# Altium PCB nrf52832_qfax_nfc.PcbDoc
Units mm, origin at the board's own origin, x right, y up, seen from the top; angles counter-clockwise.
Board outline 70.73 x 30.48 mm, 2 copper layers (Top Layer, Bottom Layer), stack 1.671 mm thick; 64 components, 75 nets, 276 pads, 97 vias.
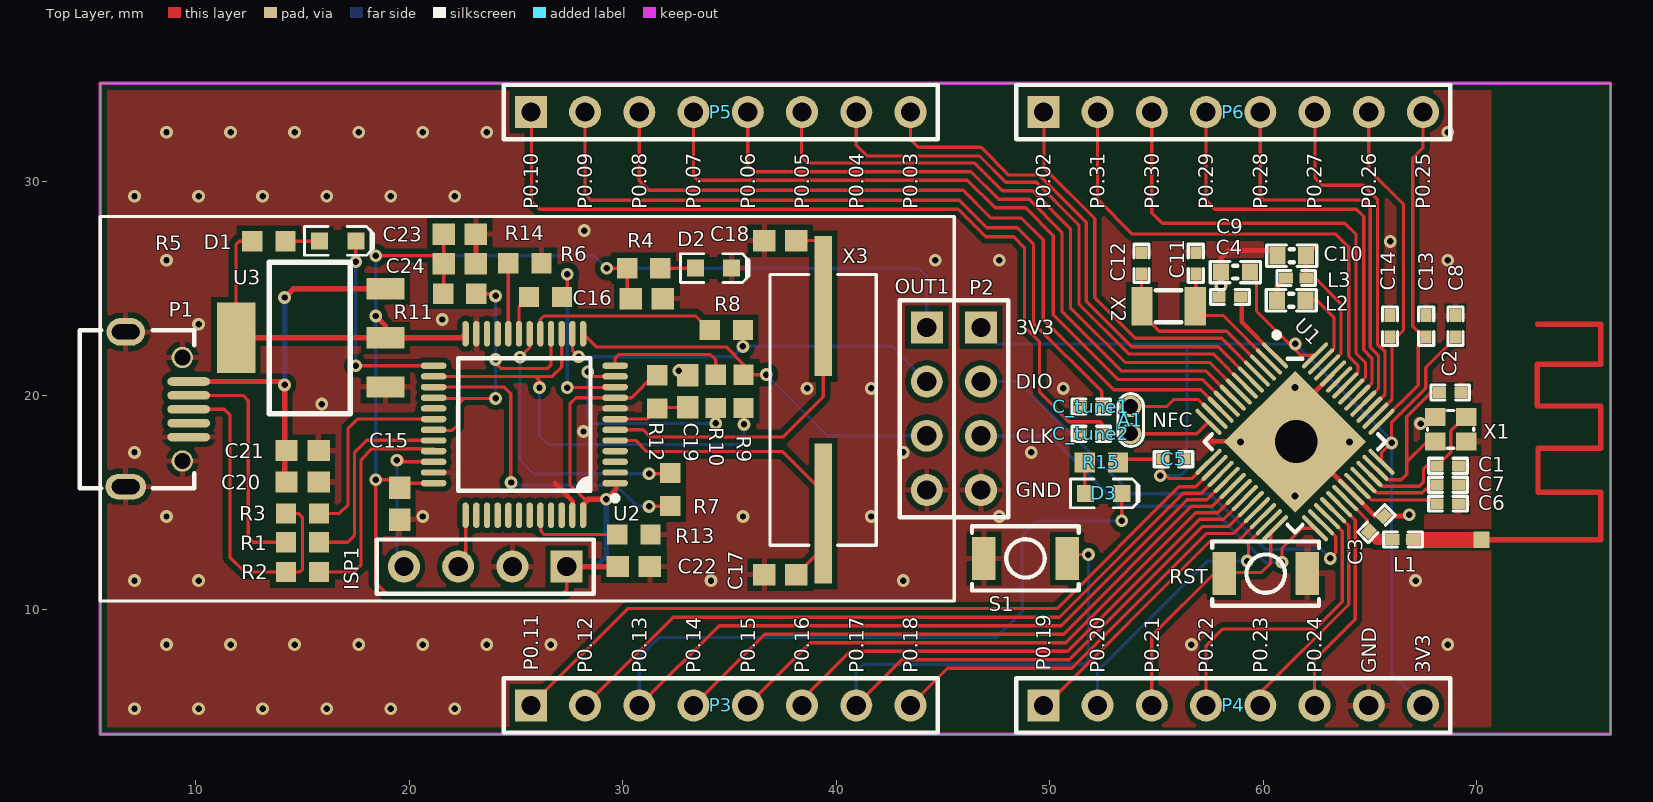
[diagram p0: Top Layer view]
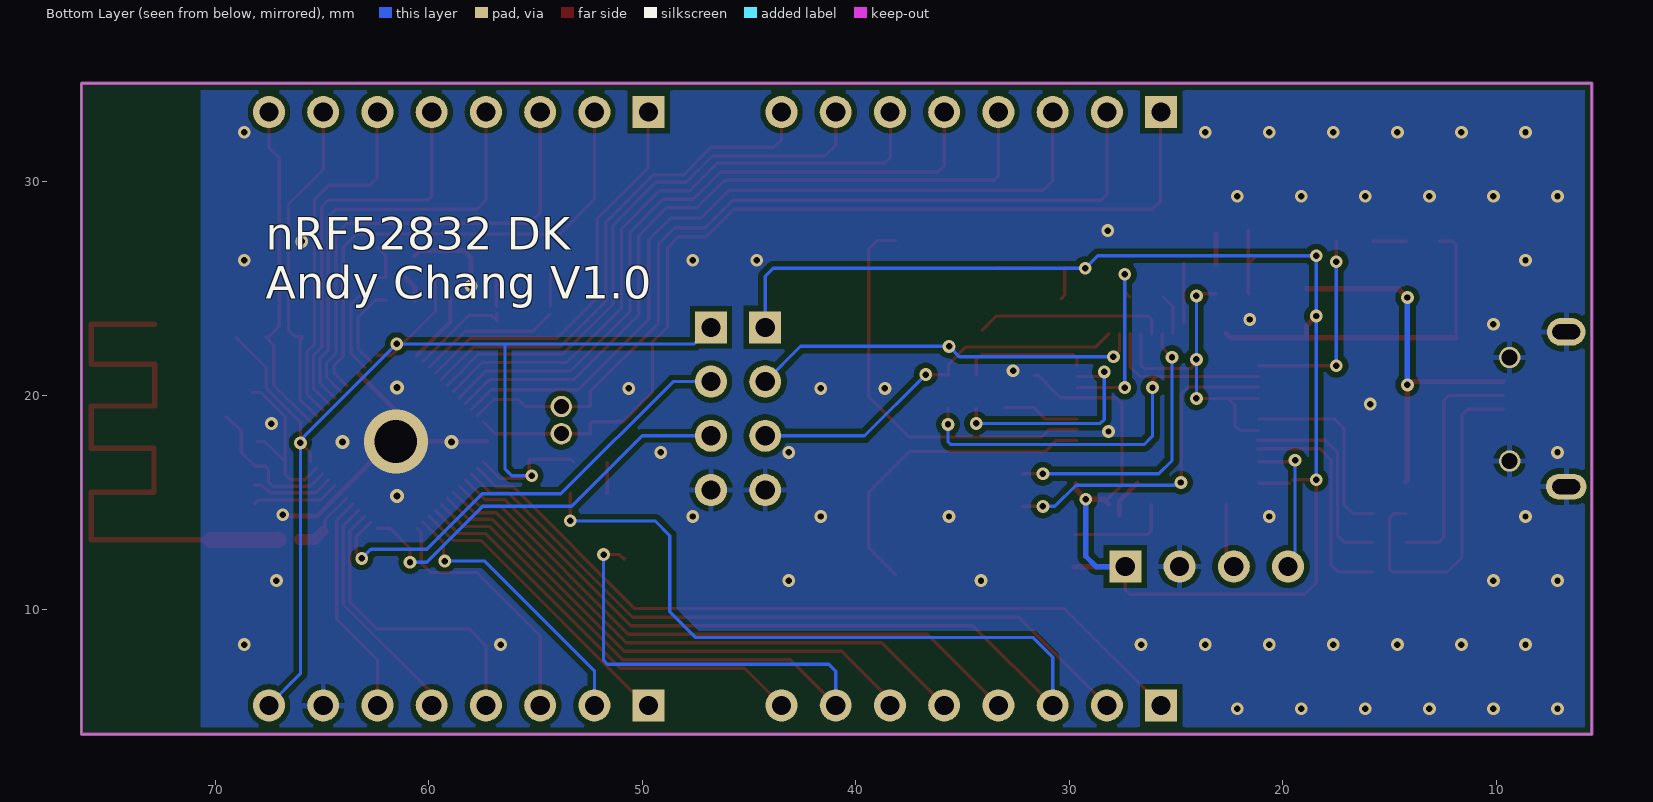
[diagram p1: Bottom Layer view, seen from below]
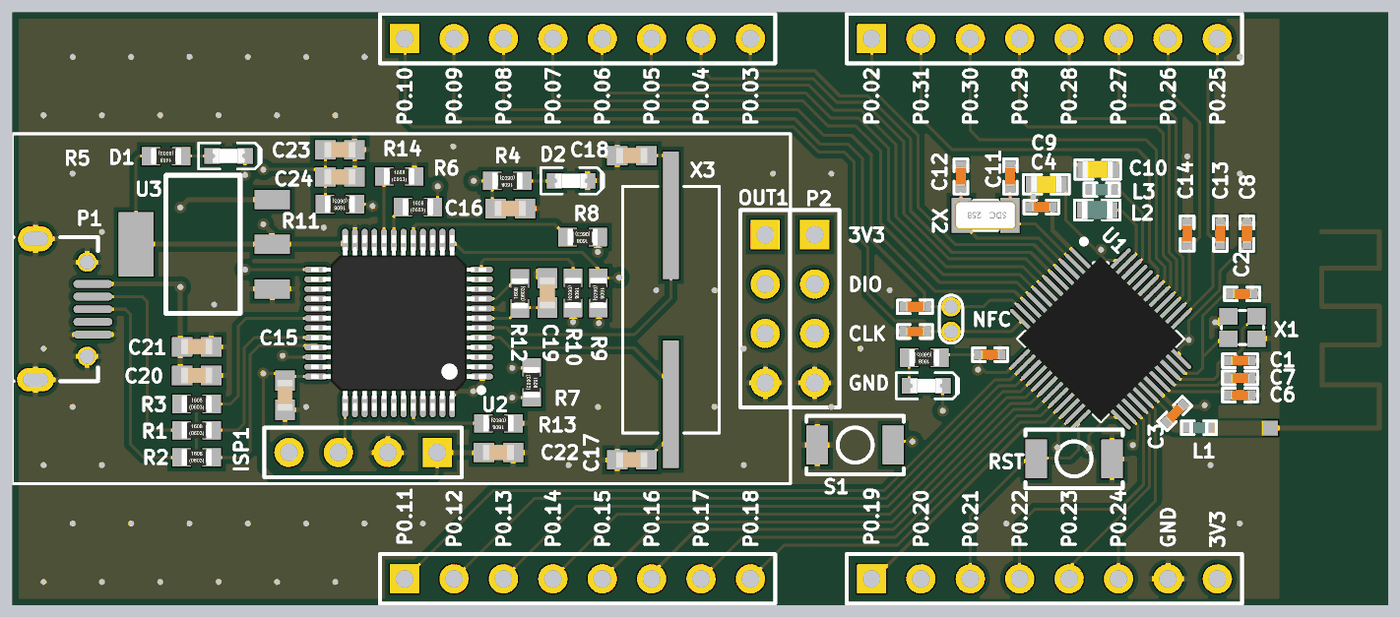
[diagram p2: 3D render of the assembled board from above, using the file's embedded part models]

## Layer stack, top to bottom
Top Solder: solder mask 0.0102, Solder Resist, Dk 3.5
Top Layer: signal copper 0.0356
Dielectric1: core 1.6002, FR-4, Dk 4.8
Bottom Layer: signal copper 0.0356
Bottom Solder: solder mask 0.0102, Solder Resist, Dk 3.5

## Board outline
5.537,4.14 76.271,4.14 76.271,34.62 5.537,34.62

## Design rules (kind name [scope] priority, off if disabled: settings)
Clearance Polygon_ANT [(InNamedPolygon('Top_Layer-GND')) or (InNamedPolygon('Bottom_Layer-GND')) vs InNet('RF')] p1: gap=0.127
Clearance Polygon [(InNamedPolygon('Top_Layer-GND')) or (InNamedPolygon('Bottom_Layer-GND'))] p2: gap=0.254
Clearance [All] p3: gap=0.152
ComponentClearance [All] p1 off: gap=0.254 collisioncheckmode=3 verticalgap=0.254 showdistances=FALSE
FabricationTestPointUsage TestPointUsage [All] p1: valid=0 allowmultiple=FALSE
FabricationTestpoint Testpoint [All] p1: side=3 testpointundercomponent=TRUE minsize=1.016 maxsize=2.54 preferedsize=1.524 minholesize=0 maxholesize=1.016 preferedholesize=0.813 testpointgrid=0.025 allowsidetop=TRUE allowsidebottom=TRUE usegrid=TRUE gridtolerance=0
Height [All] p1 off: minheight=0 maxheight=25.4 prefheight=12.7
HoleSize [All] p1: absolutevalues=TRUE maxlimit=4.064 minlimit=0.3 maxpercent=80.000 minpercent=20.000
MinimumAnnularRing [All] p1 off: minimumring=0.152
PolygonConnect PolygonConnect_1 [isVia and innet(gnd)] p1: connectstyle=Direct reliefconductorwidth=0.254 reliefentries=4 polygonreliefangle="90 Angle" airgapwidth=0.254
PolygonConnect [All] p2: connectstyle=Relief reliefconductorwidth=0.254 reliefentries=4 polygonreliefangle="90 Angle" airgapwidth=0.254
RoutingVias [All] p1: holewidth=0.406 width=0.813 viastyle="Through Hole" minholewidth=0.254 minwidth=0.254 maxholewidth=0.711 maxwidth=1.27
ShortCircuit ShortCircuit_NFC_ANT [InNet('NFC1') vs InNet('NFC2')] p1: allowed=TRUE
ShortCircuit [All] p2: allowed=FALSE
SilkToSolderMaskClearance SilkscreenOverComponentPads [IsPad] p1: minsilkscreentomaskgap=0.254 clearancetoexposedcopper=TRUE
SolderMaskExpansion [All] p1: expansion=0.076
Width [All] p1: maxlimit=2.54 minlimit=0.152 preferedwidth=0.152
23 further rules are at their usual default settings.

## Classes and differential pairs
component class nrf52832_qfaa_nfc: A1 C1 C2 C3 C4 C5 C6 C7 C8 C9 C10 C11 C12 C13 C14 C_tune1 C_tune2 L1 L2 L3 U1 X1 X2
component class connect: D3 P2 P3 P4 P5 P6 R15 RST S1
component class jlink_ob: C15 C16 C17 C18 C19 C20 C21 C22 C23 C24 D1 D2 ISP1 OUT1 P1 R1 R2 R3 R4 R5 R6 R7 R8 R9 R10 R11 R12 R13 R14 U2 U3 X3

## Components (designator, comment, footprint, x,y, rotation, side; value= is the part's Value field where it differs from the comment)
A1 "NFC Antenna" TP_2x1mm_TH 53.797,18.847 r0 top
C1 "12pF" CAPC1005X04L 68.656,16.713 r0 top
C2 "12pF" CAPC1005X04L 68.758,20.142 r0 top
C3 "0.8pF" CAPC1005X04L 65.303,13.995 r225 top
C4 "100nF" CAPC1005X04L 58.445,24.613 r180 top
C5 "100nF" CAPC1005X04L 55.804,17.018 r0 top
C6 "N.C." CAPC1005X04L 68.656,14.935 r180 top
C7 "100pF" CAPC1005X04L 68.656,15.824 r0 top
C8 "100nF" CAPC1005X04L 69.012,23.241 r90 top
C9 "4.7µF" CAPC1608X06L 58.699,25.781 r180 top
C10 "1.0µF" CAPC1608X06L 61.341,26.543 r0 top
C11 "12pF" CAPC1005X04L 56.845,26.187 r90 top
C12 "12pF" CAPC1005X04L 54.305,26.187 r90 top
C13 "12pF" CAPC1005X04L 67.64,23.241 r90 top
C14 "12pF" CAPC1005X04L 65.938,23.245 r90 top
C15 "Cap Semi" C0603 19.558,14.935 r90 top
C16 "Cap Semi" C0603 31.14,24.536 r180 top
C17 "Cap Semi" C0603 37.389,11.608 r180 top
C18 "Cap Semi" C0603 37.389,27.254 r180 top
C19 "Cap Semi" C0603 33.045,20.193 r270 top
C20 "Cap Semi" C0603 15.011,15.951 r180 top
C21 "Cap Semi" C0603 15.011,17.424 r0 top
C22 "Cap Semi" C0603 30.531,11.989 r0 top
C23 "Cap Semi" C0603 22.377,27.559 r180 top
C24 "Cap Semi" C0603 22.377,26.162 r0 top
C_tune1 "TBD" CAPC1005X04L 51.943,19.482 r180 top
C_tune2 "TBD" CAPC1005X04L 51.943,18.212 r0 top
D1 "LED" 0603 16.656,27.24 r0 top
D2 "LED" 0603 34.258,25.964 r0 top
D3 "LED" 0603 52.527,15.418 r0 top
ISP1 "SWD" HDR1X4 27.381,11.989 r180 top
L1 "3.9nH" INDC1005X04L 66.548,13.259 r0 top
L2 "10µH" INDC1608X06L 61.316,24.46 r0 top
L3 "15nH" INDC1005X04L 61.544,25.502 r180 top
OUT1 "SWD" HDR1X4 44.247,23.19 r270 top
P1 "USB-MICRO" USB-MICRO 6.731,19.355 r270 top
P2 "SWD" HDR1X4 46.787,23.19 r270 top
P3 "Header 8" HDR1X8 25.705,5.486 r0 top
P4 "Header 8" HDR1X8 49.708,5.486 r0 top
P5 "Header 8" HDR1X8 25.705,33.274 r0 top
P6 "Header 8" HDR1X8 49.708,33.274 r0 top
R1 "Resistors SMD" R0603-M 15.011,13.132 r0 top
R2 "Resistors SMD" R0603-M 15.011,11.735 r0 top
R3 "Resistors SMD" R0603-M 15.011,14.478 r0 top
R4 "Resistors SMD" R0603-M 30.988,25.959 r180 top
R5 "Resistors SMD" R0603-M 13.437,27.229 r180 top
R6 "Resistors SMD" R0603-M 26.391,24.613 r0 top
R7 "Resistors SMD" R0603-M 32.233,15.596 r270 top
R8 "Resistors SMD" R0603-M 34.862,23.063 r180 top
R9 "Resistors SMD" R0603-M 35.662,20.193 r270 top
R10 "Resistors SMD" R0603-M 34.366,20.193 r270 top
R11 "Resistors SMD" R0603-M 22.377,24.765 r180 top
R12 "Resistors SMD" R0603-M 31.623,20.168 r90 top
R13 "Resistors SMD" R0603-M 30.531,13.487 r180 top
R14 "Resistors SMD" R0603-M 25.425,26.187 r0 top
R15 "Resistors SMD" R0603-M 52.426,16.866 r180 top
RST "SW-PB" SWITCH_SMD_4x3_DHT-1185 60.122,11.659 r180 top
S1 "SW-PB" SWITCH_SMD_4x3_DHT-1185 48.87,12.37 r0 top
U1 "nRF52832-QFAA" QFN40P600X600X90-48N 61.493,17.831 r315 top
U2 "ST STM32F103 48PIN" "ST LQFP-48 7x7MM" 25.4,18.644 r180 top
U3 "AMS1117-3V3" SOT-223 18.898,20.396 r270 top
X1 "32MHz" BT-XTAL_2016 68.783,18.415 r180 top
X2 "32.768kHz" XTAL_3215 55.575,24.181 r180 top
X3 "8MHz" XTAL_ABLS2_ABR 39.395,19.329 r270 top

## Footprints (in the part's own frame and the unit in brackets; to place one, negate y for a bottom-side part, rotate by r counter-clockwise, add the part's x,y. Pads: shape width x height; smd on the part's side, far side on the other; paste and mask are expansions set on the pad)
0603 [mm]
  round 0.254 on Mech15: 0(0,0)
  rect 0.8x0.8 smd: 1(-0.85,0) 2(0.85,0)
  Top Layer pour cut-out: -0.5,0.5 0.5,0.5 0.5,-0.5 -0.5,-0.5
  silkscreen extent -1.55,-0.67 1.68,0.67, body extent -0.83,-0.36 0.83,0.36, height 0.68
BT-XTAL_2016 [mm] "Crystal 2.0 x 1.6 mm"
  rect 0.95x0.85 smd: 1(-0.725,-0.575) 2(0.725,-0.575) 3(0.725,0.575) 4(-0.725,0.575)
  silkscreen extent -1.08,-0.88 1.08,0.88
C0603 [mm] "Chip Capacitor, EIA 0603, IPC-7351 Level B Medium Density"
  round 0.254 on Mech15: 0(0,0)
  rect 1.05x1 smd: 1(-0.75,0) 2(0.75,0)
  Top Layer pour cut-out: -0.2,0.5 0.2,0.5 0.2,-0.5 -0.2,-0.5
  body extent -0.8,-0.4 0.8,0.4, height 0.78
CAPC1005X04L [mm] "Chip Capacitor, 2-Leads, Body 1.0x0.5mm, IPC High Density"
  rect 0.6x0.5 smd: 1(-0.5,0) 2(0.5,0)
  silkscreen extent -0.9,-0.35 0.9,0.35, body extent -0.51,-0.25 0.51,0.25, height 0.5
CAPC1608X06L [mm] "Chip Capacitor, 2-Leads, Body 1.6x0.8mm, IPC High Density"
  rect 0.75x0.8 smd: 1(-0.675,0) 2(0.675,0)
  silkscreen extent -1.17,-0.5 1.17,0.5, body extent -0.8,-0.43 0.8,0.43, height 0.8
HDR1X4 [mm] "Connector; Header; 4 Position"
  rect 1.5x1.5 hole 0.9: 1(0,0)
  round 1.5 hole 0.9: 2(2.54,0) 3(5.08,0) 4(7.62,0)
  silkscreen extent -1.27,-1.27 8.89,1.27
HDR1X8 [mm] "Connector; Header; 8 Position"
  rect 1.5x1.5 hole 0.9: 1(0,0)
  round 1.5 hole 0.9: 2(2.54,0) 3(5.08,0) 4(7.62,0) 5(10.16,0) 6(12.7,0) 7(15.24,0) 8(17.78,0)
  silkscreen extent -1.27,-1.27 19.05,1.27
INDC1005X04L [mm] "Chip Inductor, 2-Leads, Body 1.0x0.5mm, IPC High Density"
  rect 0.65x0.5 smd: 1(-0.475,0) 2(0.475,0)
  silkscreen extent -0.9,-0.35 0.9,0.35, body extent -0.5,-0.3 0.5,0.3, height 0.5
INDC1608X06L [mm] "Chip Inductor, 2-Leads, Body 1.6x0.8mm, IPC High Density"
  rect 0.75x0.8 smd: 1(-0.675,0) 2(0.675,0)
  silkscreen extent -1.18,-0.5 1.17,0.5, body extent -0.8,-0.48 0.8,0.48, height 0.8
QFN40P600X600X90-48N [mm] "QFN, 48-Leads, Body 6,0x6,0mm (max), Pitch 0,40mm, IPC Medium Density"
  oval 1.65x0.2 smd: 1(-3.525,2.2) 2(-3.525,1.8) 3(-3.525,1.4) 4(-3.525,1) 5(-3.525,0.6) 6(-3.525,0.2) 7(-3.525,-0.2) 8(-3.525,-0.6) 9(-3.525,-1) 10(-3.525,-1.4) 11(-3.525,-1.8) 12(-3.525,-2.2) 25(3.525,-2.2) 26(3.525,-1.8) 27(3.525,-1.4) 28(3.525,-1) 29(3.525,-0.6) 30(3.525,-0.2) 31(3.525,0.2) 32(3.525,0.6) 33(3.525,1) 34(3.525,1.4) 35(3.525,1.8) 36(3.525,2.2)
  oval 0.2x1.65 smd: 13(-2.2,-3.525) 14(-1.8,-3.525) 15(-1.4,-3.525) 16(-1,-3.525) 17(-0.6,-3.525) 18(-0.2,-3.525) 19(0.2,-3.525) 20(0.6,-3.525) 21(1,-3.525) 22(1.4,-3.525) 23(1.8,-3.525) 24(2.2,-3.525) 37(2.2,3.525) 38(1.8,3.525) 39(1.4,3.525) 40(1,3.525) 41(0.6,3.525) 42(0.2,3.525) 43(-0.2,3.525) 44(-0.6,3.525) 45(-1,3.525) 46(-1.4,3.525) 47(-1.8,3.525) 48(-2.2,3.525)
  rect 4.7x4.7 smd: 49(0,0)
  silkscreen extent -4.27,-3 3,3.05, body extent -3.02,-3.02 3.02,3.02, height 0.86
R0603-M [mm] "Chip Resistor, 2-Leads, Body 1.68x0.88mm, IPC Medium Density"
  rect 0.95x0.95 smd: 1(-0.775,0) 2(0.775,0)
  Top Layer pour cut-out: -0.254,0.675 0.254,0.675 0.254,-0.675 -0.254,-0.675
  body extent -0.77,-0.42 0.78,0.43, height 0.44
SOT-223 [mm]
  rect 3.3x1.8 smd: 0(-2.3,-7)
  rect 1x1.8 smd: 1(0,0) 2(-2.3,0) 3(-4.6,0)
  silkscreen extent -5.85,-5.45 1.25,-1.64
"ST LQFP-48 7x7MM" [mm] "LQFP, 48-Leads, Body 7.00x7.00mm, Pitch 0.50mm, IPC Medium Density"
  oval 1.2x0.3 smd: 1(-4.25,2.75) 2(-4.25,2.25) 3(-4.25,1.75) 4(-4.25,1.25) 5(-4.25,0.75) 6(-4.25,0.25) 7(-4.25,-0.25) 8(-4.25,-0.75) 9(-4.25,-1.25) 10(-4.25,-1.75) 11(-4.25,-2.25) 12(-4.25,-2.75) 25(4.25,-2.75) 26(4.25,-2.25) 27(4.25,-1.75) 28(4.25,-1.25) 29(4.25,-0.75) 30(4.25,-0.25) 31(4.25,0.25) 32(4.25,0.75) 33(4.25,1.25) 34(4.25,1.75) 35(4.25,2.25) 36(4.25,2.75)
  oval 0.3x1.2 smd: 13(-2.75,-4.25) 14(-2.25,-4.25) 15(-1.75,-4.25) 16(-1.25,-4.25) 17(-0.75,-4.25) 18(-0.25,-4.25) 19(0.25,-4.25) 20(0.75,-4.25) 21(1.25,-4.25) 22(1.75,-4.25) 23(2.25,-4.25) 24(2.75,-4.25) 37(2.75,4.25) 38(2.25,4.25) 39(1.75,4.25) 40(1.25,4.25) 41(0.75,4.25) 42(0.25,4.25) 43(-0.25,4.25) 44(-0.75,4.25) 45(-1.25,4.25) 46(-1.75,4.25) 47(-2.25,4.25) 48(-2.75,4.25)
  silkscreen extent -4.38,-3.1 3.1,3.57, body extent -4.51,-4.51 4.51,4.51, height 1.55
SWITCH_SMD_4x3_DHT-1185 [mm]
  rect 1.1x2 smd: 1(-1.95,0) 2(1.95,0)
  silkscreen extent -2.5,-1.5 2.5,1.5
TP_2x1mm_TH [mm]
  round 1 hole 0.7: 1(0,-0.635) 2(0,0.635)
  silkscreen extent -0.6,-1.23 0.6,1.23
USB-MICRO [mm] "USB方孔"
  oval 1.3x1.8 hole 0.7 slot 1.3 at 90 deg: 0(-3.625,0)
  round 1 hole 0.75: 0(-2.425,2.65) 0(2.425,2.65)
  oval 1.2x1.9 hole 0.7 slot 1.3 at 90 deg: 0(3.625,0)
  oval 0.4x2 smd: 1(-1.3,2.95) 2(-0.65,2.95) 3(0,2.95) 4(0.65,2.95) 5(1.3,2.95)
  silkscreen extent -3.7,-2.15 3.7,3.21
XTAL_3215 [mm] "XTAL SMD 3.2 x 1.5 mm"
  rect 1x1.8 smd: 1(-1.25,0) 2(1.25,0)
  silkscreen extent -0.6,-0.75 0.6,0.75, body extent -1.6,-0.75 1.6,0.75, height 0.81
XTAL_ABLS2_ABR [mil]
  rect 258.5x32 smd: 1(-191.25,0) 2(191.27,0)
  silkscreen extent -250,-98 250,98, body extent 0,0 10,10, height 10

## Part data
A1: library part NFC_ANT_TP
C1 C2 C11 C12 C13 C14: library part C0402-12p, "Capacitor, NP0, ∮2%"
C3: library part C0402-0.8p, "Capacitor, NP0, ∮5%"
C4 C5 C8: library part C0402-100n, "Capacitor, X7R, ∮10%"
C6: library part C0402-N.C., "Not mounted"
C7: library part C0402-100p, "Capacitor, NP0, ∮5%"
C9: library part C0603-4£g7, "Capacitor, X5R, ∮10%"
C10: library part C0603-1£g0, "Capacitor, X7R, ∮10%"
C15 C16 C17 C18 C19 C20 C21 C22 C23 C24: "Capacitor (Semiconductor SIM Model)"
C_tune1 C_tune2: library part C0402-TBD, "Capacitor, NP0, ∮5%"
D1 D2 D3: "Typical INFRARED GaAs LED"
ISP1 OUT1 P2: library part "Header 4", "Header, 4-Pin"
L1: library part L0402-3n9, "High frequency chip inductor ∮5%"
L2: library part L0603-10£g, "Chip inductor, IDC,min = 50 mA, ∮20%"
L3: library part L0402-15n, "High frequency chip inductor ∮10%"
P3 P4 P5 P6: "Header, 8-Pin"
R1 R2 R3 R4 R5 R6 R7 R8 R9 R10 R11 R12 R13 R14 R15: "Resistor"
RST S1: "Switch"
U1: "Multi-protocol Bluetooth Low Energy, ANT and 2.4GHz proprietary system-on-chip"
U3: library part AMS1117
X1: library part XTAL_SMD2016_32MHz_8pF_General, "XTAL SMD 2016, 32MHz, Cl=8pF, Total Tol: ∮40ppm"
X2: library part XTAL_SMD3215_32.768kHz_9pF_General, "XTAL SMD 3215, 32.768kHz, Cl=9pF, Total Tol: ∮50ppm"
X3: library part crystal, "No Description Available"

## Free pads (board coordinates)
  rect 0.762x0.762 smd: 0(70.231,13.24)

## Via types
v1: diameter 0.6, hole 0.3, Top Layer to Bottom Layer, tented both sides, 92 vias
v2: diameter 0.66, hole 0.33, Top Layer to Bottom Layer, tented both sides, 4 vias
v3: diameter 3, hole 2, Top Layer to Bottom Layer, 1 vias

## Nets (pads, with @x,y where several pads share a name; then routed paths per layer and width w, separated by ;. In a path a pad name is that pad's centre, name@x,y a point inside that pad or via, vN(x,y) a via of type N, cw(c..) or ccw(c..) an arc to the next point about the centre after c; other vN are vias at no path point)
3V3: C15.2 C16.2 C22.1 C23.2 C24.1 ISP1.1 OUT1.1 R4.2 R5.2 R11.2 R12.2 U2.1 U2.9 U2.24 U2.36 U2.48 U3.0 U3.2 | length 102.5
  Top Layer w0.152: U3.0 11.898,27.087 12.04,27.229 R5.2 ; v1(18.44,26.543) 21.246,26.543 21.623,26.167 C23.2@21.623,27.756 ; C15.2@19.545,16.053 v1(18.44,16.053) 18.44,11.227 18.974,10.693 27.178,10.693 27.381,10.897 ISP1.1 ; C15.2@19.704,15.894 U2.36 ; R11.2 21.627,24.79 C24.1 ; v1(29.235,15.138) 28.219,15.138 27.534,15.824 27.534,19.609 27.818,19.894 U2.9 30.42,19.894 31.469,20.943 R12.2 ; v1(29.261,25.959) R4.2 30.213,24.714 C16.2
  Top Layer w0.254: U3.0 U3.2 ; v1(18.44,23.724) 18.898,23.266 U3.2 ; U2.24 22.453,22.696 U3.2 ; ISP1.1 C22.1 ; U2.48@28.15,14.902 28.387,15.138 v1(29.235,15.138) 29.693,15.596 U2.1@29.693,15.875
  Bottom Layer w0.152: v1(18.44,16.053) v1(18.44,23.724) v1(18.44,26.543) 28.677,26.543 v1(29.261,25.959) 43.866,25.959 44.247,25.578 OUT1.1
  Bottom Layer w0.254: ISP1.1 28.753,11.989 29.235,12.471 v1(29.235,15.138)
DEC1: C4.1 U1.1 | length 3.3
  Top Layer w0.203: C4.1@59.004,24.562 59.004,23.431 U1.1
DEC2: C6.2 U1.32 | length 4.1
  Top Layer w0.152: U1.32 65.066,15.107 67.985,15.107 C6.2
DEC3: C7.1 U1.33 | length 3.9
  Top Layer w0.152: U1.33 65.296,15.443 67.462,15.443 67.818,15.799 C7.1@68.174,15.799
DEC4: C10.2 L3.1 U1.46 | length 7
  Top Layer w0.152: L3.1 62.019,26.546 62.397,26.924 ; L3.1@62.019,25.527 62.408,25.527 63.652,24.282 63.652,21.971 62.996,21.314 U1.46
GND: C1.2 C2.2 C3.1 C4.2 C5.2 C6.1 C7.2 C8.2 C9.2 C10.1 C11.2 C12.2 C13.2 C14.2 C15.1 C16.1 C17.2 C18.2 C19.1 C20.1 C21.2 C22.2 C23.1 C24.2 C_tune1.2 C_tune2.1 D2.2 ISP1.2 OUT1.4 P1.0 P1.5 P2.4 P4.7 R13.1 R14.2 RST.1 S1.1 U1.31 U1.45 U1.49 U2.8 U2.23 U2.35 U2.47 U3.1 X1.2 X1.4 | length 22.1
  Top Layer w0.229: C24.2 C23.1 ; 26.822,15.9 27.65,15.073 U2.47 ; 57.276,17.856 61.468,17.856 U1.49 61.493,19.245 U1.45 ; C4.2 57.945,25.052 v1(58.026,25.133) ; C9.2 58.026,26.454 58.369,26.797 60.412,26.797 C10.1 ; U1.49@61.776,17.831 U1.31 65.258,14.349 C3.1 66.775,14.349 v1(66.84,14.414)
  other v1: 7.142,5.333 10.142,5.333 13.142,5.333 16.142,5.333 19.142,5.333 22.142,5.333 8.642,8.333 11.642,8.333 14.642,8.333 17.642,8.333 20.642,8.333 23.642,8.333 26.642,8.333 56.642,8.333 68.642,8.333 7.142,11.333 10.142,11.333 34.142,11.333 43.142,11.333 67.142,11.333 8.642,14.333 20.642,14.333 35.642,14.333 41.642,14.333 47.642,14.333 7.142,17.333 43.142,17.333 49.142,17.333 28.169,18.313 67.373,18.681 15.913,19.596 38.642,20.333 41.642,20.333 50.642,20.333 32.639,21.158 10.142,23.333 21.552,23.558 8.642,26.333 44.642,26.333 47.642,26.333 68.642,26.333 65.951,27.216 28.206,27.724 7.142,29.333 10.142,29.333 13.142,29.333 16.142,29.333 19.142,29.333 22.142,29.333 8.642,32.333 11.642,32.333 14.642,32.333 17.642,32.333 20.642,32.333 23.642,32.333 68.642,32.333
  other v2: 61.493,15.285 58.948,17.831 64.039,17.831 61.493,20.376
  other v3: 61.547,17.849
JTCK: ISP1.3 U2.37 | length 3.1
  Top Layer w0.152: ISP1.3 22.65,12.338 U2.37@22.65,14.902
JTMS: ISP1.4 U2.34 | length 6.8
  Top Layer w0.152: v1(19.431,16.967) 19.505,16.894 U2.34
  Bottom Layer w0.152: v1(19.431,16.967) 19.431,12.167 ISP1.4@19.609,11.989
LED: D1.2 U2.25 | length 9.5
  Top Layer w0.152: v1(17.501,21.394) U2.25 ; v1(17.501,26.264) 17.506,26.269 D1.2
  Bottom Layer w0.152: v1(17.501,21.394) v1(17.501,26.264)
NetC3_2: C3.2 L1.1 U1.30 | length 3.3
  Top Layer w0.152: U1.30 64.872,14.17 C3.2@64.872,13.603
  Top Layer w0.508: C3.2 65.333,13.259 L1.1
NetC17_1: C17.1 U2.5 X3.2 | length 15.1
  Top Layer w0.152: U2.5 30.62,17.894 31.14,17.374 37.493,17.374 39.395,15.471 39.395,12.864 C17.1
NetC18_1: C18.1 U2.6 X3.1 | length 19
  Top Layer w0.152: U2.6 30.959,18.394 31.293,18.059 37.516,18.059 39.395,19.939 39.395,23.187 39.395,26.873 39.014,27.254 C18.1
NetC19_2: C19.2 R12.1 U2.7 | length 3.6
  Top Layer w0.152: U2.7 31.124,18.894 R12.1 31.673,19.443 C19.2
NetD1_1: D1.1 R5.1 | length 1.6
  Top Layer w0.152: R5.1 15.795,27.229 D1.1
NetD2_1: D2.1 R4.1 | length 1.6
  Top Layer w0.152: R4.1 D2.1@33.403,25.959
NetD3_1: D3.1 R15.2 | length 1.5
  Top Layer w0.152: R15.2 51.651,15.444 D3.1
NetL2_1: L2.1 L3.2 | length 1.2
  Top Layer w0.229: L2.1 60.641,25.073 L3.2
NetL2_2: L2.2 U1.47 | length 4
  Top Layer w0.152: L2.2 62.509,24.46 63.322,23.647 63.322,22.2 U1.47@62.716,21.593
NetP1_2: P1.2 R1.1 | length 11.2
  Top Layer w0.152: P1.2 12.228,20.005 12.471,19.761 12.471,13.36 12.7,13.132 R1.1
NetP1_3: P1.3 R2.1 R3.1 | length 15.7
  Top Layer w0.152: P1.3 11.354,19.355 11.609,19.099 11.609,12.419 12.293,11.735 14.237,11.735 14.884,11.735 15.011,11.862 15.011,14.275 14.808,14.478 R3.1
NetR13_2: R13.2 U2.44 | length 4.9
  Top Layer w0.152: U2.44@26.162,14.89 26.162,13.665 26.34,13.487 R13.2
NetR14_1: R14.1 U2.20 | length 2.8
  Top Layer w0.152: U2.20@24.65,23.402 R14.1
NFC1: A1.2 C_tune1.1 P5.2 U1.11 | length 41.1
  Top Layer w0.152: P5.2@28.245,33.858 28.245,29.413 28.509,29.149 45.766,29.149 47.061,27.854 48.486,27.854 49.241,27.099 49.241,23.39 52.443,20.188 C_tune1.1 A1.2 55.474,19.482 55.804,19.812 56.967,19.812 U1.11
NFC2: A1.1 C_tune2.2 P5.1 U1.12 | length 44.4
  Top Layer w0.152: P5.1@25.733,33.223 25.733,29.106 26.111,28.727 45.72,28.727 47.015,27.432 48.311,27.432 48.819,26.924 48.819,23.216 49.53,22.504 49.53,20.142 50.902,18.771 52.375,18.771 52.443,18.702 C_tune2.2 ; C_tune2.2@52.451,18.212 A1.1 56.889,18.212 U1.12
P0.00/XL1: C11.1 U1.2 X2.1 | length 6.3
  Top Layer w0.152: X2.1@56.825,23.825 56.825,23.49 57.085,23.749 58.121,23.749 U1.2 ; X2.1 56.845,24.201 C11.1
P0.01/XL2: C12.1 U1.3 X2.2 | length 8.2
  Top Layer w0.152: C12.1 54.305,24.201 X2.2 ; X2.2@54.325,23.825 55.138,23.012 58.292,23.012 U1.3
P0.02/AIN0: P6.1 U1.4 | length 18.7
  Top Layer w0.152: P6.1@49.733,33.249 49.733,30.667 52.112,28.288 52.112,24.58 54.009,22.682 58.056,22.682 U1.4
P0.03/AIN1: P5.8 U1.5 | length 24.1
  Top Layer w0.152: P5.8 43.485,31.979 43.843,31.62 46.79,31.62 48.085,30.325 49.509,30.325 51.712,28.122 51.712,24.414 53.844,22.282 57.891,22.282 U1.5
P0.04/AIN2: P5.7 U1.6 | length 26.6
  Top Layer w0.152: P5.7 40.945,31.725 41.453,31.217 46.717,31.217 47.945,29.988 49.37,29.988 51.375,27.983 51.375,24.274 53.704,21.945 57.662,21.945 U1.6 U1.6@59.139,20.465
P0.05/AIN3: P5.6 U1.7 | length 29.2
  Top Layer w0.152: P5.6@38.379,33.198 38.379,31.166 38.662,30.884 46.484,30.884 47.78,29.588 49.204,29.588 50.975,27.817 50.975,24.109 53.538,21.545 57.496,21.545 U1.7
P0.06: P5.5 U1.8 | length 31.9
  Top Layer w0.152: P5.5 35.865,30.759 36.141,30.484 46.319,30.484 47.614,29.188 49.038,29.188 50.575,27.651 50.575,23.943 53.373,21.145 57.33,21.145 U1.8
P0.07: P5.4 U1.9 | length 34.6
  Top Layer w0.152: P5.4 33.325,30.277 33.518,30.084 46.153,30.084 47.448,28.788 48.873,28.788 50.175,27.486 50.175,23.777 53.207,20.745 57.165,20.745 U1.9
P0.08: P5.3 U1.10 | length 37.1
  Top Layer w0.152: P5.3 30.785,30.048 31.226,29.607 45.956,29.607 47.251,28.312 48.675,28.312 49.699,27.289 49.699,23.58 53.01,20.269 57.075,20.269 U1.10
P0.11: P3.1 U1.14 | length 36.6
  Top Layer w0.152: P3.1 30.238,10.02 50.355,10.02 56.058,15.723 56.84,15.723 U1.14
P0.12: P3.2 U1.15 | length 34.3
  Top Layer w0.152: P3.2 32.378,9.62 50.463,9.62 56.261,15.418 57.101,15.418 U1.15
P0.13: D3.2 P3.3 U1.16 | length 62.8
  Top Layer w0.152: P3.3 34.518,9.22 50.546,9.22 56.439,15.113 57.361,15.113 U1.16 ; v1(53.378,14.135) D3.2
  Bottom Layer w0.152: P3.3 30.785,7.747 31.699,8.661 47.498,8.661 48.717,9.881 48.717,13.437 49.403,14.122 v1@53.391,14.122
P0.14: P3.4 U1.17 | length 29.5
  Top Layer w0.152: P3.4 36.658,8.82 50.654,8.82 56.642,14.808 57.622,14.808 U1.17
P0.15: P3.5 U1.18 | length 27.1
  Top Layer w0.152: P3.5 38.798,8.42 50.762,8.42 56.845,14.503 57.883,14.503 U1.18
P0.16: P3.6 U1.19 | length 24.3
  Top Layer w0.152: P3.6@38.678,6.025 40.673,8.02 50.844,8.02 57.023,14.199 58.144,14.199 U1.19
P0.17: P3.7 S1.2 U1.20 | length 40.9
  Top Layer w0.152: P3.7 43.078,7.62 50.927,7.62 57.175,13.868 58.38,13.868 U1.20 ; S1.2 50.858,12.331 51.074,12.548 v1(51.816,12.548)
  Bottom Layer w0.152: P3.7 40.945,7.087 41.275,7.417 51.638,7.417 51.816,7.595 v1@51.816,12.344
P0.18: P3.8 U1.21 | length 20
  Top Layer w0.152: P3.8 45.218,7.22 51.035,7.22 57.353,13.538 58.615,13.538 U1.21
P0.19: P4.1 U1.22 | length 14
  Top Layer w0.152: P4.1@49.682,5.512 49.86,5.512 57.556,13.208 58.85,13.208 U1.22
P0.20: P4.2 U1.23 | length 12.9
  Top Layer w0.152: v1@59.309,12.344 59.309,13.101 U1.23
  Bottom Layer w0.152: P4.2 52.248,7.112 57.379,12.243 v1(59.258,12.243)
P0.21: P4.3 RST.2 U1.24 | length 12
  Top Layer w0.152: P4.3 54.788,8.749 57.748,11.709 59.919,11.709 60.355,12.146 60.355,13.581 U1.24
P0.22: P4.4 U1.27 | length 14.3
  Top Layer w0.152: P4.4 57.328,8.28 58.115,9.068 62.433,9.068 63.703,10.338 63.703,13.641 U1.27
P0.23: P4.5 U1.28 | length 11.2
  Top Layer w0.152: P4.5 59.868,6.071 64.008,10.212 64.008,13.902 U1.28
P0.24: P4.6 U1.29 | length 10.5
  Top Layer w0.152: P4.6 62.408,7.62 64.313,9.525 64.313,14.163 U1.29
P0.25: C13.1 P6.8 U1.37 | length 15.9
  Top Layer w0.152: U1.37 67.259,20.485 67.259,22.36 C13.1 67.505,22.741 67.005,23.241 67.005,31.115 67.488,31.598 P6.8
P0.26: C14.1 P6.7 U1.38 | length 15.8
  Top Layer w0.152: P6.7@64.948,33.249 64.948,30.582 66.573,28.956 66.573,23.063 66.256,22.745 C14.1@66.04,22.745 ; U1.38 66.04,19.832 C14.1@66.04,22.745 ; C14.1@65.938,22.636 C14.1 C14.1@66.04,22.745
P0.27: P6.6 U1.39 | length 16.7
  Top Layer w0.152: P6.6@62.433,33.249 62.433,30.175 62.763,29.845 64.694,29.845 65.355,29.184 65.355,22.402 65.71,22.047 65.71,20.067 U1.39
P0.28/AIN4: P6.5 U1.40 | length 19
  Top Layer w0.152: P6.5@59.868,33.249 59.868,29.312 60.02,29.159 64.694,29.159 65.014,28.839 65.014,22.261 65.398,21.876 65.398,20.322 U1.40
P0.29/AIN5: P6.4 U1.41 | length 20.7
  Top Layer w0.152: P6.4@57.328,33.249 57.328,29.134 57.734,28.727 64.364,28.727 64.708,28.383 64.708,22.134 65.094,21.749 65.094,20.583 U1.41
P0.30/AIN6: P6.3 U1.42 | length 22.5
  Top Layer w0.152: P6.3@54.788,33.249 54.788,28.55 55.27,28.067 63.83,28.067 64.349,27.548 64.349,21.985 64.789,21.546 64.789,20.843 U1.42
P0.31/AIN7: P6.2 U1.43 | length 23.7
  Top Layer w0.152: P6.2@52.248,33.249 52.248,29.185 53.873,27.559 63.398,27.559 64.008,26.949 64.008,21.844 64.44,21.412 64.44,21.06 U1.43
RF: L1.2 pad.0 | length 33.8
  Top Layer w0.254: pad.0@70.089,13.251 75.816,13.251 75.816,15.469 72.873,15.469 72.873,17.526 75.816,17.526 75.816,19.507 72.847,19.507 72.847,21.463 75.816,21.463 75.816,23.343 72.852,23.343
  Top Layer w0.762: L1.2@67.056,13.24 pad.0@70.231,13.233
SWDCLK: P2.3 U1.25 | length 19.1
  Top Layer w0.152: v1(60.884,12.192) 60.884,12.852 61.814,13.783 U1.25
  Bottom Layer w0.152: P2.3 50.013,18.11 53.315,14.808 57.48,14.808 60.096,12.192 v1(60.884,12.192)
SWDIO: P2.2 U1.26 | length 21.9
  Top Layer w0.152: U1.26 63.398,13.38 63.398,12.624 v1(63.144,12.37)
  Bottom Layer w0.152: P2.2 48.565,20.65 53.823,15.392 57.506,15.392 60.096,12.802 62.713,12.802 v1(63.144,12.37)
TCKIN: OUT1.3 R9.1 U2.13 | length 18.4
  Top Layer w0.152: U2.13 28.768,22.276 34.849,22.276 35.662,21.463 R9.1 36.716,20.968 v1(36.728,20.98)
  Bottom Layer w0.152: v1(36.728,20.98) 39.599,18.11 OUT1.3
TCKOUT: R9.2 U2.15 U2.26 | length 22
  Top Layer w0.152: U2.26 25.908,20.894 ; v1(26.111,20.371) 26.111,20.69 25.908,20.894 ; U2.15 27.15,21.333 26.71,20.894 25.908,20.894 ; R9.2 35.687,19.393 v1(35.687,18.644)
  Bottom Layer w0.152: v1(26.111,20.371) 26.111,18.085 26.492,17.704 35.56,17.704 35.687,17.831 v1(35.687,18.644)
TDIIN: R7.1 U2.18 | length 13.4
  Top Layer w0.152: v1(25.197,21.793) 25.65,22.246 U2.18 ; v1(31.242,16.332) R7.1@32.194,16.332
  Bottom Layer w0.152: v1(25.197,21.793) 25.197,16.942 25.806,16.332 v1(31.242,16.332)
TDIOUT: R7.2 U2.27 | length 15.8
  Top Layer w0.152: U2.27 24.463,20.394 24.765,20.091 v1@24.765,15.913 ; v1(24.778,15.926) v1@24.79,15.926 ; v1(31.242,14.808) R7.2@32.22,14.808
  Bottom Layer w0.152: v1(24.778,15.926) 24.905,15.799 29.693,15.799 30.683,14.808 v1(31.242,14.808)
TDOIN: R11.1 U2.16 U2.28 U2.31 | length 15.7
  Top Layer w0.152: U2.31@21.15,18.363 22.02,18.363 22.25,18.593 22.25,19.533 22.581,19.863 ; U2.28@21.15,19.863 22.581,19.863 ; R11.1 23.952,24.765 v1(24.054,24.663) ; v1(24.054,19.863) 22.581,19.863 ; v1(24.054,21.692) 24.054,21.514 24.308,21.26 26.467,21.26 26.65,21.443 U2.16
  Bottom Layer w0.152: v1(24.054,19.863) v1(24.054,21.692) v1(24.054,24.663)
TMSIN: OUT1.2 R8.1 U2.14 | length 18.4
  Top Layer w0.152: U2.14 27.65,22.109 v1(27.94,21.819)
  Bottom Layer w0.152: v1(27.94,21.819) 35.154,21.819 v1(35.636,22.301) 42.596,22.301 OUT1.2
TMSOUT: R8.2 U2.17 | length 8.9
  Top Layer w0.152: U2.17 26.15,23.559 26.314,23.724 33.426,23.724 R8.2
TRESIN: R10.1 U2.12 | length 5.9
  Top Layer w0.152: U2.12 29.65,21.751 29.82,21.92 34.112,21.92 34.366,21.666 R10.1
TRESOUT: R10.2 U2.11 | length 10.4
  Top Layer w0.152: v1(28.372,21.107) 28.586,20.894 U2.11 ; v1(34.366,18.693) R10.2
  Bottom Layer w0.152: v1(28.372,21.107) 28.372,18.872 28.551,18.693 v1@34.341,18.693
TRSTIN: R6.1 U2.19 | length 1.9
  Top Layer w0.152: U2.19 25.15,24.147 R6.1
TRSTOUT: R6.2 U2.10 | length 8.7
  Top Layer w0.152: R6.2 27.407,24.854 v1(27.407,25.679) ; v1(27.407,20.371) 29.627,20.371 U2.10
  Bottom Layer w0.152: v1(27.407,20.371) v1(27.407,25.679)
"USBD EN": R3.2 U2.30 | length 9.3
  Top Layer w0.152: R3.2 16.739,14.478 17.145,14.884 17.145,18.466 17.573,18.894 U2.30
USBD+: R2.2 U2.33 | length 10.7
  Top Layer w0.152: R2.2 17.424,11.735 17.755,12.065 17.755,16.993 18.263,17.501 U2.33@21.184,17.501
USBD-: R1.2 U2.32 | length 9.7
  Top Layer w0.152: R1.2 17.12,13.132 17.45,13.462 17.45,17.348 18.009,17.907 U2.32@21.209,17.907
VDD_NRF: C5.1 C8.1 C9.1 P2.1 P4.8 R15.1 U1.13 U1.36 U1.48 | length 59.8
  Top Layer w0.152: R15.1 53.353,17.018 C5.1@55.296,17.018 ; C5.1 C5.1@55.296,17.018 ; U1.13 56.661,16.109 55.595,16.109 55.296,16.408 C5.1@55.296,17.018 ; C9.1@59.385,25.756 59.69,25.451 59.69,23.952 61.763,21.879 U1.48 ; U1.36 65.541,17.307 v1(66.015,17.78) 66.015,18.745 67.615,20.345 67.615,21.311 C8.1@69.012,22.708
  Bottom Layer w0.152: P2.1 47.562,22.415 56.439,22.415 ; v1(55.181,16.243) 56.121,16.243 56.439,16.561 56.439,22.415 ; P4.8 66.015,6.959 v1(66.015,17.78) 66.015,17.906 v1(61.506,22.415) 56.439,22.415
VUSB: C20.2 C21.1 P1.1 U3.3 | length 18.1
  Top Layer w0.254: P1.1 14.016,20.655 v1(14.173,20.498) 14.173,16.039 C20.2 ; v1(14.173,24.587) 14.582,24.996 U3.3
  Bottom Layer w0.254: v1(14.173,20.498) v1(14.173,24.587)
XC1: C1.1 U1.34 X1.1 | length 7.1
  Top Layer w0.152: U1.34 65.556,15.748 67.31,15.748 67.513,15.951 67.513,16.116 67.513,16.561 67.64,16.688 C1.1@68.131,16.688 ; C1.1@68.097,16.739 68.188,16.739 68.783,17.334 68.783,18.338 69.435,18.99 X1.1
XC2: C2.1 U1.35 X1.3 | length 8.2
  Top Layer w0.152: U1.35 65.817,16.053 66.472,16.053 66.726,16.307 66.726,16.891 ; X1.3 67.675,17.84 66.726,16.891 ; C2.1@68.275,20.142 67.869,20.142 66.726,18.999 66.726,16.891
pads on no net: C15.0 C16.0 C17.0 C18.0 C19.0 C20.0 C21.0 C22.0 C23.0 C24.0 D1.0 D2.0 D3.0 P1.4 U1.44 U2.2 U2.3 U2.4 U2.21 U2.22 U2.29 U2.38 U2.39 U2.40 U2.41 U2.42 U2.43 U2.45 U2.46

## Polygon pours and split planes (outlines as drawn)
GND on Top Layer "Top_Layer-GND" (solid, remove dead copper, pour order 1002): -1.473,36.322 -1.473,2.972 77.343,2.972 77.343,36.322
GND on Bottom Layer "Top_Layer-GND" (solid, remove dead copper, pour order 1004): 2.565,51.486 2.565,2.21 79.172,2.21 79.172,51.486

## Keep-outs
Keep-Out Layer:
  the board outline again, w0.152

## Other copper
Top Layer:
  pour cut-out: 67.539,12.852 64.287,12.852 64.287,15.037 67.539,15.037
  pour cut-out: 76.347,34.925 70.683,34.925 70.683,3.607 76.347,3.607
Bottom Layer:
  pour cut-out: 76.347,35.814 70.683,35.814 70.683,3.875 76.347,3.875

## Silkscreen, mask and mechanical layers (free items; w line width, h text height)
Top Overlay:
  lines w0.152: 5.537,10.38 45.537,10.38 45.537,28.38 5.537,28.38 5.537,10.38
  text "P0.10" at 26.048,28.727 h0.69 r90
  text "P0.09" at 28.588,28.727 h0.69 r90
  text "P0.08" at 31.128,28.727 h0.69 r90
  text "P0.07" at 33.668,28.727 h0.69 r90
  text "P0.06" at 36.208,28.727 h0.69 r90
  text "P0.05" at 38.748,28.727 h0.69 r90
  text "P0.04" at 41.288,28.727 h0.69 r90
  text "P0.03" at 43.828,28.727 h0.69 r90
  text "P0.02" at 50.051,28.727 h0.69 r90
  text "P0.31" at 52.591,28.727 h0.69 r90
  text "P0.30" at 55.131,28.727 h0.69 r90
  text "P0.29" at 57.671,28.727 h0.69 r90
  text "P0.28" at 60.211,28.727 h0.69 r90
  text "P0.27" at 62.751,28.727 h0.69 r90
  text "P0.26" at 65.291,28.727 h0.69 r90
  text "P0.25" at 67.831,28.727 h0.69 r90
  text "3V3" at 48.425,22.847 h0.69
  text "DIO" at 48.425,20.307 h0.69
  text "NFC" at 54.8,18.504 h0.69
  text "CLK" at 48.425,17.767 h0.69
  text "GND" at 48.425,15.227 h0.69
  text "P0.11" at 26.048,7.112 h0.69 r90
  text "P0.19" at 50.051,7.112 h0.69 r90
  text "P0.12" at 28.588,6.998 h0.69 r90
  text "P0.13" at 31.128,6.998 h0.69 r90
  text "P0.14" at 33.668,6.998 h0.69 r90
  text "P0.15" at 36.208,6.998 h0.69 r90
  text "P0.16" at 38.748,6.998 h0.69 r90
  text "P0.17" at 41.288,6.998 h0.69 r90
  text "P0.18" at 43.828,6.998 h0.69 r90
  text "P0.20" at 52.591,6.998 h0.69 r90
  text "P0.21" at 55.131,6.998 h0.69 r90
  text "P0.22" at 57.671,6.998 h0.69 r90
  text "P0.23" at 60.211,6.998 h0.69 r90
  text "P0.24" at 62.751,6.998 h0.69 r90
  text "GND" at 65.291,6.998 h0.69 r90
  text "3V3" at 67.831,6.998 h0.69 r90
Bottom Overlay:
  text "nRF52832 DK / Andy Chang V1.0" at 67.64,24.536 h1.52

## Text inside footprints (layer, text, board x,y; h text height)
X3: Mechanical 7 "3.15" at 36.195,20.599 h1.27 r270; Mechanical 7 "12.282" at 41.072,21.234 h1.27 r270